# Altium PCB Front_panel.PcbDoc
Units mil, origin at the board's own origin, x right, y up, seen from the top; angles counter-clockwise.
Board outline 4369.68 x 729.91 mil, 2 copper layers (Top Layer, Bottom Layer); 8 components, 23 nets, 63 pads, 0 vias.
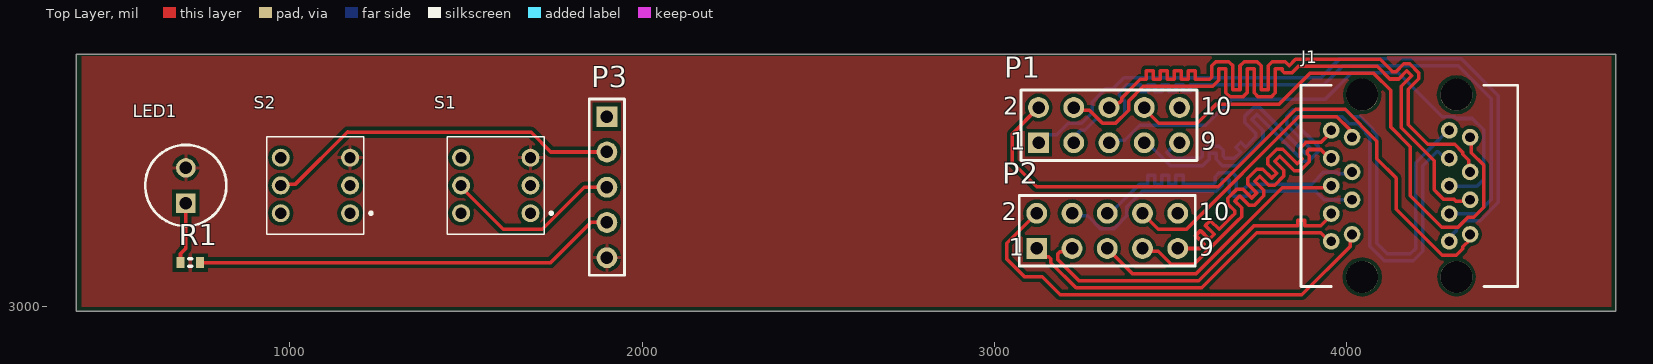
[diagram p0: Top Layer view]
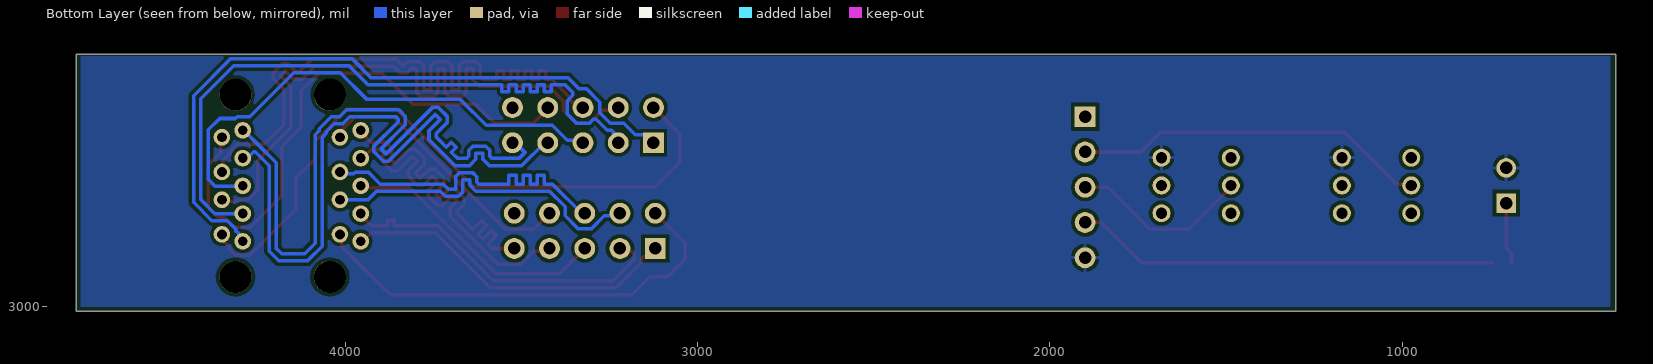
[diagram p1: Bottom Layer view, seen from below]
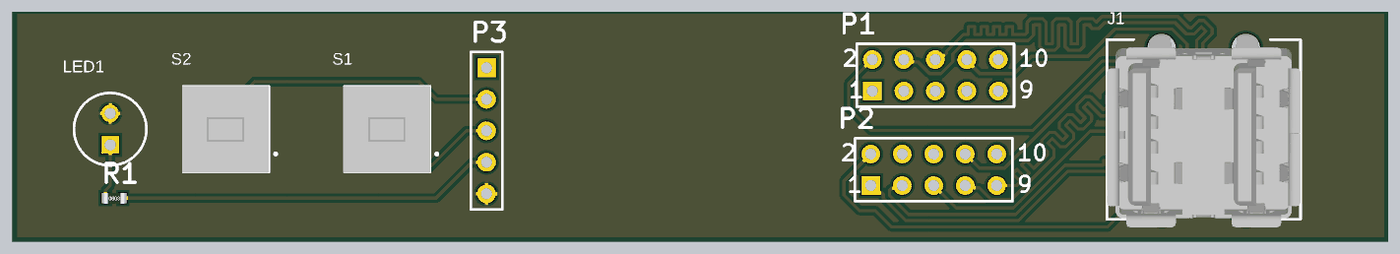
[diagram p2: 3D render of the assembled board from above, using the file's embedded part models]

## Layer stack, top to bottom
Top Solder: solder mask 0.4, Solder Resist, Dk 3.5
Top Layer: signal copper 1.4
Dielectric 1: dielectric 12.6, FR-4, Dk 4.8
Bottom Layer: signal copper 1.4
Bottom Solder: solder mask 0.4, Solder Resist, Dk 3.5

## Board outline
4763.38,3716.56 393.7,3716.56 393.7,2986.64 4763.38,2986.64

## Design rules (kind name [scope] priority, off if disabled: settings)
AssemblyTestPointUsage AssemblyTestPointUsage_1 [All] p2:
AssemblyTestpoint AssemblyTestpoint_1 [All] p2: testpointundercomponent=TRUE minsize=40 maxsize=100 preferedsize=60 minholesize=0 maxholesize=40 preferedholesize=32 testpointgrid=1 usegrid=TRUE gridtolerance=0.01 allowsidetop=TRUE allowsidebottom=TRUE
Clearance [All] p1: gap=10 ignorepadtopadclearanceinfootprint=FALSE except(0: Arc-Hole Track-Hole SMDPad-Hole THPad-Hole Via-Hole Fill-Hole Poly-Hole Region-Hole Text-Hole)
Clearance Clearance_1 [All] p2: gap=10 ignorepadtopadclearanceinfootprint=FALSE except(0: Arc-Hole Track-Hole SMDPad-Hole THPad-Hole Via-Hole Fill-Hole Poly-Hole Region-Hole Text-Hole)
ComponentClearance ComponentClearance_1 [All] p2: gap=10 collisioncheckmode=3 verticalgap=10 showdistances=FALSE
DiffPairsRouting [All] p1: maxlimit=10 minlimit=10 mostfreqgap=10 toplayer_minwidth=10 toplayer_maxwidth=15 toplayer_prefwidth=15 bottomlayer_minwidth=10 bottomlayer_maxwidth=15 bottomlayer_prefwidth=15 maxuncoupledlength=500
DiffPairsRouting DiffPairsRouting_1 [All] p2: maxlimit=10 minlimit=10 mostfreqgap=10 toplayer_minwidth=15 toplayer_maxwidth=15 toplayer_prefwidth=15 bottomlayer_minwidth=15 bottomlayer_maxwidth=15 bottomlayer_prefwidth=15 maxuncoupledlength=500
FabricationTestPointUsage FabricationTestPointUsage_1 [All] p2: valid=0 allowmultiple=FALSE
FabricationTestpoint FabricationTestpoint_1 [All] p2: side=3 testpointundercomponent=TRUE minsize=40 maxsize=100 preferedsize=60 minholesize=0 maxholesize=40 preferedholesize=32 testpointgrid=1 allowsidetop=TRUE allowsidebottom=TRUE usegrid=TRUE gridtolerance=0.01
FanoutControl Fanout_LCC [IsLCC] p1: bgadir=Out bgaviamode=Centered fanoutstyle=Auto fanoutdirection=Alternating viagrid=1 // Fanout_LCC (Default Rule)
FanoutControl Fanout_BGA [IsBGA] p2: bgadir=Out bgaviamode=Centered fanoutstyle=Auto fanoutdirection=Alternating viagrid=1 // Fanout_BGA (Default Rule)
FanoutControl Fanout_Small [(CompPinCount < 5)] p3: bgadir=Out bgaviamode=Centered fanoutstyle=Auto fanoutdirection=OutThenIn viagrid=1 // Fanout_Small (Default Rule)
FanoutControl Fanout_SOIC [IsSOIC] p4: bgadir=Out bgaviamode=Centered fanoutstyle=Auto fanoutdirection=Alternating viagrid=1 // Fanout_SOIC (Default Rule)
FanoutControl Fanout_BGA_1 [IsBGA] p6: bgadir=Out bgaviamode=Centered fanoutstyle=Auto fanoutdirection=Alternating viagrid=1 // Fanout_BGA (Default Rule)
FanoutControl Fanout_LCC_1 [IsLCC] p7: bgadir=Out bgaviamode=Centered fanoutstyle=Auto fanoutdirection=Alternating viagrid=1 // Fanout_LCC (Default Rule)
FanoutControl Fanout_SOIC_1 [IsSOIC] p8: bgadir=Out bgaviamode=Centered fanoutstyle=Auto fanoutdirection=Alternating viagrid=1 // Fanout_SOIC (Default Rule)
FanoutControl Fanout_Small_1 [(CompPinCount < 5)] p9: bgadir=Out bgaviamode=Centered fanoutstyle=Auto fanoutdirection=OutThenIn viagrid=1 // Fanout_Small (Default Rule)
FanoutControl Fanout_Default_1 [All] p10: bgadir=Out bgaviamode=Centered fanoutstyle=Auto fanoutdirection=Alternating viagrid=1 // Fanout_Default (Default Rule)
Height Height_1 [All] p2: minheight=0 maxheight=1000 prefheight=500
HoleSize HoleSize_1 [All] p2: absolutevalues=TRUE maxlimit=100 minlimit=1 maxpercent=80.000 minpercent=20.000
HoleToHoleClearance HoleToHoleClearance_1 [All] p2: gap=10 allowstackedmicrovias=TRUE
LayerPairs LayerPairs_1 [All] p2: enforce=TRUE
MinimumSolderMaskSliver MinimumSolderMaskSliver_1 [All] p2: minsoldermaskwidth=10
NetAntennae NetAntennae_1 [All] p2: netantennaetolerance=0
PasteMaskExpansion PasteMaskExpansion_1 [All] p2: expansion=0
PlaneClearance PlaneClearance_1 [All] p2: clearance=20
PlaneConnect PlaneConnect_1 [All] p2: planeconnectstyle=Relief reliefexpansion=20 reliefentries=4 reliefconductorwidth=10 reliefairgap=10
PolygonConnect [All] p1: connectstyle=Relief reliefconductorwidth=10 reliefentries=4 polygonreliefangle="90 Angle" airgapwidth=10
PolygonConnect PolygonConnect_1 [All] p2: connectstyle=Relief reliefconductorwidth=10 reliefentries=4 polygonreliefangle="90 Angle" airgapwidth=10
RoutingCorners RoutingCorners_1 [All] p2: cornerstyle=45-Degree minsetback=100 maxsetback=100
RoutingLayers RoutingLayers_1 [All] p2: top layer_v5=TRUE bottom layer_v5=TRUE
RoutingPriority RoutingPriority_1 [All] p2: routingpriority=0
RoutingTopology RoutingTopology_1 [All] p2: topology=Shortest
RoutingVias [All] p1: holewidth=28 width=50 viastyle="Through Hole" minholewidth=28 minwidth=50 maxholewidth=28 maxwidth=50
RoutingVias RoutingVias_1 [All] p2: holewidth=28 width=50 viastyle="Through Hole" minholewidth=28 minwidth=50 maxholewidth=28 maxwidth=50
ShortCircuit ShortCircuit_1 [All] p2: allowed=FALSE
SilkToBoardRegionClearance SilkToBoardRegionClearance_1 [All] p2:
SilkToSilkClearance SilkToSilkClearance_1 [All] p2: silktosilkclearance=10
SilkToSolderMaskClearance SilkToSolderMaskClearance_1 [IsPad] p2: minsilkscreentomaskgap=10 clearancetoexposedcopper=TRUE
SolderMaskExpansion [All] p1: expansion=4 istentingtop=FALSE
SolderMaskExpansion SolderMaskExpansion_1 [All] p2: expansion=4 istentingtop=FALSE
UnRoutedNet UnRoutedNet_1 [All] p2:
UnpouredPolygon UnpouredPolygon_1 [All] p2:
Width [All] p1: maxlimit=10 minlimit=10 preferedwidth=10
Width Width_1 [All] p2: maxlimit=10 minlimit=10 preferedwidth=10
25 further rules are at their usual default settings.

## Classes and differential pairs
differential pair STDA_SSTX_2: +STDA_SSTX_2_P -STDA_SSTX_2_N
differential pair STDA_SSTX_1: +STDA_SSTX_1_P -STDA_SSTX_1_N
differential pair STDA_SSRX_2: +STDA_SSRX_2_P -STDA_SSRX_2_N
differential pair STDA_SSRX_1: +STDA_SSRX_1_P -STDA_SSRX_1_N
differential pair D_2: +D_2_P -D_2_N
differential pair D_1: +D_1_P -D_1_N

## Components (designator, comment, footprint, x,y, rotation, side; value= is the part's Value field where it differs from the comment)
J1 "Connector 2xUSB3.0" 48409-0003 4349.67,3205 r90 top locked
LED1 "LTL-307EE" LTL307YE 705,3293.87 r90 top locked
P1 "Header 5X2" HDR2X5 3125,3465 r0 top locked
P2 "Header 5X2" HDR2X5 3120,3165 r0 top locked
P3 "Header 5" HDR1X5 1900,3538.87 r270 top locked
R1 "1k" res-smd-0603 689.88,3125 r0 top locked
S1 "TL2230OAF140" TL2230OAF140 1683.07,3265.13 r90 top locked
S2 "TL2230OAF140" TL2230OAF140 1171.26,3265.13 r90 top locked

## Footprints (in the part's own frame and the unit in brackets; to place one, negate y for a bottom-side part, rotate by r counter-clockwise, add the part's x,y. Pads: shape width x height; smd on the part's side, far side on the other; paste and mask are expansions set on the pad)
48409-0003 [mm]
  round 1.2 hole 0.7: 1(0,0) 2(2.5,0) 3(4.5,0) 4(7,0) 5(7.5,1.5) 6(5.5,1.5) 7(3.5,1.5) 8(1.5,1.5) 9(-0.5,1.5) 10(0,8.51) 11(2.5,8.51) 12(4.5,8.51) 13(7,8.51) 14(7.5,10.01) 15(5.5,10.01) 16(3.5,10.01) 17(1.5,10.01) 18(-0.5,10.01)
  round 2.3 hole 2.3 unplated: 19(-3.07,0.98) 20(10.07,0.98) 21(-3.07,7.78) 22(10.07,7.78)
  silkscreen extent -3.75,-3.43 10.75,12.19, body extent -4.38,-3.43 11.37,12.19, height 15.31
HDR1X5 [mm] "Connector; Header; 5 Position"
  rect 1.5x1.5 hole 0.9: 1(0,0)
  round 1.5 hole 0.9: 2(2.54,0) 3(5.08,0) 4(7.62,0) 5(10.16,0)
  silkscreen extent -1.27,-1.27 11.43,1.27
HDR2X5 [mm] "Connector; Header; 5x2 Position"
  rect 1.5x1.5 hole 0.9: 1(0,0)
  round 1.5 hole 0.9: 2(0,2.54) 3(2.54,0) 4(2.54,2.54) 5(5.08,0) 6(5.08,2.54) 7(7.62,0) 8(7.62,2.54) 9(10.16,0) 10(10.16,2.54)
  silkscreen extent -1.27,-1.27 11.43,3.81
LTL307YE [mm]
  rect 1.416x1.416 hole 0.91: 1(0,0)
  round 1.416 hole 0.91: 2(2.54,0)
  silkscreen extent -1.66,-2.92 4.2,2.92, body extent -0.75,-1.55 3.24,1.94, height 5.88
res-smd-0603 [mm]
  rect 0.6x0.8 smd: 1(0,0) 2(1.4,0)
  silkscreen extent 0.61,-0.28 0.81,0.28, body extent -0.11,-0.45 1.53,0.4, height 0.26
TL2230OAF140 [mm]
  round 1.3 hole 0.8: 1(0,0) 2(2,0) 3(4,0) 4(0,5) 5(2,5) 6(4,5)
  silkscreen extent -1.5,-1.6 5.5,6, body extent -1.52,-0.96 5.48,6.04, height 3

## Part data
J1: library part 48409-0003, "Conector 2xUSB3.0 Molex", Manufacturer_Part_Number=484090003, Mfr_Name="Molex Connector Corporation", Copyright="Copyright (C) 2021 Ultra Librarian. All rights reserved.", RefDes=RefDes, Type=DEV
LED1: "LED Red", Manufacturer_Name=Lite-On, Datasheet Link=http://media.digikey.com/pdf/Data%20Sheets/Lite-On%20PDFs/LTL-307EE.pdf, Height=9.85mm, Manufacturer_Part_Number=LTL-307EE
P1 P2: "Header, 5-Pin, Dual row", LatestRevisionDate=17-Jul-2002, LatestRevisionNote="Re-released for DXP Platform.", Publisher="Altium Limited"
P3: "Header, 5-Pin", LatestRevisionDate=17-Jul-2002, LatestRevisionNote="Re-released for DXP Platform.", Publisher="Altium Limited"
R1: library part Res1, "Resistor", LatestRevisionDate=17-Jul-2002, LatestRevisionNote="Re-released for DXP Platform.", PackageDescription="Axial Device, Thru-Hole; 2 Leads; 0.3 in Pin Spacing", PackageReference=AXIAL-0.3, Published=8-Jun-2000, Publisher="Altium Limited"
S1 S2: "Switch Momentary", Manufacturer_Name=E-Switch, Mouser2 Part Number=612-TL2230-OA, Datasheet Link=https://componentsearchengine.com//TL2230OAF140.pdf, Height=12.5mm, Manufacturer_Part_Number=TL2230OAF140, Mouser2 Price/Stock=https://www.mouser.com/Search/Refine.aspx?Keyword=612-TL2230-OA

## Nets (pads, with @x,y where several pads share a name; then routed paths per layer and width w, separated by ;. In a path a pad name is that pad's centre, name@x,y a point inside that pad or via, vN(x,y) a via of type N, cw(c..) or ccw(c..) an arc to the next point about the centre after c; other vN are vias at no path point)
D_1_N: J1.11 P2.4 | length 952.8
  Bottom Layer w10: P2.4 3227.5,3257.5 3264.53,3257.5 3301.56,3220.47 3338.44,3220.47 3375.47,3257.5 3375.47,3283.44 3419.82,3327.8 3610,3327.8 3629.14,3327.8 3646.72,3345.37 3646.72,3360.47 3666.72,3360.47 3666.72,3324.51 3678.43,3312.8 3715,3312.8 3730,3327.8 3775,3327.8 3910.95,3327.8 3936.07,3302.68 4013.88,3302.68 J1.11
D_1_P: J1.12 P2.6 | length 964
  Bottom Layer w10: P2.6 3328.74,3265 3411.54,3347.8 3430,3347.8 3435,3347.8 3435,3372.8 3455,3372.8 3455,3347.8 3475,3347.8 3475,3372.8 3495,3372.8 3495,3347.8 3515,3347.8 3515,3372.8 3535,3372.8 3535,3347.8 3545,3347.8 3610,3347.8 3620.86,3347.8 3626.72,3353.65 3626.72,3368.76 3638.43,3380.47 3675,3380.47 3686.72,3368.76 3686.72,3332.8 3706.72,3332.8 3721.72,3347.8 3775,3347.8 3899.94,3347.8 3933.56,3381.42 3971.57,3381.42 3975.82,3377.17 J1.12@4014.63,3377.17
D_2_N: J1.2 P1.4 | length 1904.1
  Top Layer w10: P1.4 3232.5,3557.5 3269.53,3557.5 3306.56,3520.47 3343.44,3520.47 3380.47,3557.5 3380.47,3583.44 3422.03,3625 3619.14,3625 3636.72,3642.57 3636.72,3675 3656.72,3675 3656.72,3606.72 3668.43,3595 3705,3595 3716.72,3606.72 3716.72,3675 3736.72,3675 3736.72,3606.72 3748.43,3595 3785,3595 3796.72,3606.72 3796.72,3675 3816.72,3675 3816.72,3669.84 3823.39,3663.16 3843.96,3663.16 3862.53,3681.73 4086.41,3681.73 4095.82,3672.33 4116.29,3651.86 4122.15,3646 4147,3646 4169.93,3668.93 4184.07,3654.79 4154.46,3625.17 4154.46,3507.78 4247.92,3414.32 4247.92,3331.08 4251.99,3327.01 4251.99,3326.8 4274.62,3304.17 4305.12,3304.17 4310.86,3298.43 J1.2@4349.67,3298.43
D_2_P: J1.3 P1.6 | length 1906.2
  Top Layer w10: P1.6 3338.27,3565 3351.63,3578.36 3354.61,3578.36 3360.47,3584.21 3360.47,3591.73 3413.74,3645 3430,3645 3430,3670 3450,3670 3450,3645 3470,3645 3470,3670 3490,3670 3490,3645 3510,3645 3510,3670 3530,3670 3530,3645 3550,3645 3550,3670 3570,3670 3570,3645 3610.86,3645 3616.72,3650.86 3616.72,3683.28 3628.43,3695 3665,3695 3676.72,3683.28 3676.72,3615 3696.72,3615 3696.72,3683.28 3708.43,3695 3745,3695 3756.72,3683.28 3756.72,3615 3776.72,3615 3776.72,3683.28 3788.43,3695 3825,3695 3836.26,3683.74 3854.25,3701.73 4094.7,3701.73 4122.75,3673.68 4130.43,3666 4138.72,3666 4161.64,3688.93 4178.21,3688.93 4204.07,3663.07 4204.07,3646.5 4174.46,3616.89 4174.46,3516.06 4229.52,3461 4305.77,3461 4329.24,3437.53 4329.24,3432.53 4345.98,3415.79 J1.3@4345.98,3380.85
GND: LED1.2 P3.5 S1.3 S2.3
GND_DRAIN_1: J1.16 P2.5 | length 766.5
  Top Layer w10: P2.5 3391.6,3093.4 3571.83,3093.4 3816.23,3337.8 J1.16@3955.57,3337.8
GND_DRAIN_2: J1.7 P1.5 | length 1459.4
  Bottom Layer w10: P1.5 3332.5,3472.5 3369.53,3472.5 3412.03,3515 3600,3515 3673,3588 3938,3588 4014,3664 4146,3664 4271.1,3538.9 4306.61,3538.9 4311.61,3533.9 4356.1,3533.9 4388.29,3501.71 4388.29,3385.02 4388.29,3361.17 4369.17,3342.05 4333.67,3342.05 4333.62,3342 4291.41,3342 J1.7
GND_USB_1: J1.13 P2.8 | length 783.4
  Top Layer w10: P2.8 3465,3220 3545,3220 3863.9,3538.9 3971.57,3538.9 4007.5,3502.97 4007.5,3482.72 J1.13@4014.63,3475.59
GND_USB_2: J1.4 P1.8 | length 1598.2
  Top Layer w10: P1.8 3425,3561.33 3465.86,3520.47 3575.47,3520.47 3630,3575 3808.3,3575 3895.03,3661.73 4076.27,3661.73 4124.17,3613.83 4124.17,3509.78 4180,3453.95 4180,3315.05 4269.62,3225.43 4315.43,3225.43 4343.71,3253.71 4359.58,3253.71 4388.29,3282.43 4388.29,3401.76 4353.08,3436.97 4353.08,3472.17 J1.4@4349.67,3475.59
LED: P3.4 R1.2 | length 1202.2
  Top Layer w10: R1.2 1740,3125 1853.87,3238.87 P3.4
NetLED1_1: LED1.1 R1.1 | length 170.1
  Top Layer w10: R1.1 689.89,3149.89 705,3165 LED1.1@705,3288.87
STDA_SSRX_1_N: J1.14 P2.9 | length 988.5
  Top Layer w10: P2.9 3582.97,3165 3591.49,3173.51 3595.02,3177.05 3570.27,3201.8 3584.41,3215.94 3609.16,3191.19 3623.31,3205.33 3598.56,3230.08 3612.7,3244.23 3637.45,3219.48 3647.67,3229.7 3673.99,3256.01 3681.66,3263.69 3681.66,3271.98 3662.27,3291.37 3662.27,3307.94 3688.13,3333.8 3704.7,3333.8 3730.18,3308.31 3744.32,3322.46 3718.84,3347.94 3718.84,3364.51 3744.7,3390.36 3761.26,3390.36 3786.75,3364.88 3800.89,3379.03 3775.41,3404.51 3775.41,3421.08 3801.26,3446.93 3817.83,3446.93 3859.05,3405.72 3873.19,3419.86 3867.94,3425.11 3867.94,3449.97 3881.49,3463.51 3883.88,3465.91 3926.2,3465.91 J1.14@3955.57,3495.28
STDA_SSRX_1_P: J1.15 P2.7 | length 977.5
  Top Layer w10: P2.7 3427.5,3157.5 3464.53,3157.5 3502.03,3120 3566.26,3120 3688.13,3241.87 3701.66,3255.41 3701.66,3280.26 3682.27,3299.65 3696.41,3313.8 3721.89,3288.31 3738.46,3288.31 3764.32,3314.17 3764.32,3330.74 3738.84,3356.22 3752.98,3370.36 3778.46,3344.88 3795.03,3344.88 3820.89,3370.74 3820.89,3387.31 3795.41,3412.79 3809.55,3426.93 3850.76,3385.72 3867.33,3385.72 3893.19,3411.58 3893.19,3428.15 3887.94,3433.4 3887.94,3441.68 3892.16,3445.91 3899.09,3445.91 3926.2,3445.91 J1.15@3955.57,3416.54
STDA_SSRX_2_N: J1.5 P1.9 | length 2025.2
  Bottom Layer w10: P1.9 3517.04,3465 3489.53,3437.49 3506.56,3420.47 3583.06,3420.47 3588.92,3426.33 3588.92,3443.76 3600.64,3455.47 3637.21,3455.47 3648.92,3443.76 3648.92,3426.33 3654.78,3420.47 3680.34,3420.47 3698.47,3438.6 3684.33,3452.74 3698.47,3466.89 3712.61,3452.74 3729.93,3470.07 3742,3482.14 3742,3490.43 3709.6,3522.83 3709.6,3539.4 3735.45,3565.26 3752.02,3565.26 3884.03,3433.25 3898.17,3447.39 3829.69,3515.87 3829.69,3540.72 3847.27,3558.3 ; J1.5@4290.61,3495.28 4282.33,3495.28 4247.1,3460.05 4195,3407.95 4195,3165 4180,3150 4115,3150 4085,3180 4085,3488.12 4073.25,3499.87 4073.25,3504.87 4038.91,3539.21 4015.37,3539.21 3995.69,3558.9 3892.12,3558.9 ; 3847.27,3558.3 3847.87,3558.9 ; 3847.27,3558.3 3847.87,3558.9 ; 3847.87,3558.9 3892.12,3558.9 ; 3847.87,3558.9 3892.12,3558.9
STDA_SSRX_2_P: J1.6 P1.7 | length 1972.4
  Bottom Layer w10: P1.7 3433.74,3465 3498.27,3400.47 3591.35,3400.47 3608.92,3418.05 3608.92,3435.47 3628.92,3435.47 3628.92,3418.05 3646.5,3400.47 3688.62,3400.47 3744.08,3455.92 3762,3473.86 3762,3498.71 3729.6,3531.11 3743.74,3545.26 3875.74,3413.25 3892.31,3413.25 3918.17,3439.11 3918.17,3455.68 3849.69,3524.15 3849.69,3532.44 3855.55,3538.3 3918.15,3538.9 3939.58,3538.9 3987.4,3538.9 4007.09,3519.21 4030.63,3519.21 4053.25,3496.59 4053.25,3491.59 4065,3479.84 4065,3171.72 4106.72,3130 4188.28,3130 4215,3156.72 4215,3399.66 4255.39,3440.05 4259.51,3440.05 4283.02,3416.54 J1.6@4290.61,3416.54
STDA_SSTX_1_N: J1.17 P2.3 | length 970.5
  Top Layer w10: P2.3 3211.17,3156.17 3185.86,3156.17 3180,3150.31 3180,3133.02 3239.61,3073.4 3580.12,3073.4 3736.4,3229.68 3850,3229.68 3860,3229.68 3860,3244.68 3880,3244.68 3880,3229.68 3905,3229.68 3926.2,3229.68 J1.17@3955.57,3259.06
STDA_SSTX_1_P: J1.18 P2.1 | length 965.3
  Top Layer w10: P2.1 3143.2,3141.8 3154.14,3141.8 3160,3135.94 3160,3124.73 3231.33,3053.4 3588.4,3053.4 3744.68,3209.68 3926.2,3209.68 J1.18@3955.57,3180.32
STDA_SSTX_2_N: J1.8 P1.3 | length 1973.6
  Bottom Layer w10: P1.3 3225,3478.27 3238.36,3491.63 3238.36,3494.61 3244.21,3500.47 3256.1,3500.47 3287.19,3531.56 3295.47,3531.56 3306.56,3520.47 3343.44,3520.47 3369.53,3546.56 3369.53,3583.44 3353.56,3599.41 3353.56,3607.7 3375.86,3630 3415,3630 3415,3610 3435,3610 3435,3630 3455,3630 3455,3610 3475,3610 3475,3630 3495,3630 3495,3610 3515,3610 3515,3630 3535,3630 3535,3610 3555,3610 3555,3630 3934.94,3630 3988.94,3684 4316,3684 4410,3590 4410,3304.14 4369.92,3264.05 J1.8
STDA_SSTX_2_P: J1.9 P1.1 | length 1967.1
  Bottom Layer w10: P1.1 3148.2,3488.2 3176.59,3488.2 3208.87,3520.47 3247.82,3520.47 3277.19,3549.84 3277.19,3580.16 3314.73,3617.7 3335.27,3617.7 3367.57,3650 3565,3650 3926.66,3650 3980.66,3704 4324.28,3704 4430,3598.28 4430,3295.85 4378.14,3243.99 4334.04,3243.99 4311.05,3221 4311.05,3216 4302.8,3207.75 4302.8,3207.58 4290.61,3195.39 J1.9@4290.61,3180.32
SW1: P3.3 S1.5 | length 512.6
  Top Layer w10: S1.5@1486.22,3338.87 1605.55,3219.54 1716.83,3219.54 1836.16,3338.87 P3.3
SW2: P3.2 S2.5 | length 1014.2
  Top Layer w10: S2.5@974.41,3338.87 982.26,3346.72 1015,3346.72 1164.14,3495.86 1165,3495 1685,3495 1741.13,3438.87 P3.2
VBUS_1: J1.10 P2.2 | length 1270
  Top Layer w10: P2.2 3035,3180 3035,3135 3085,3085 3135,3085 3186.6,3033.4 3872.08,3033.4 4009.34,3170.67 4009.34,3194.71 J1.10@4014.63,3200
VBUS_2: J1.1 P1.2 | length 1889.9
  Top Layer w10: P1.2 3050,3490 3050,3410 3120,3340 3635,3340 3855,3560 3995,3560 4085.31,3469.69 4085.31,3419.69 4140,3365 4140,3276.31 4270.31,3146 4310.92,3146 4329.24,3164.32 4329.24,3169.49 4349.67,3189.92 J1.1@4349.67,3200
pads on no net: J1.19 J1.20 J1.21 J1.22 P1.10 P2.10 P3.1 S1.1 S1.2 S1.4 S1.6 S2.1 S2.2 S2.4 S2.6

## Polygon pours and split planes (outlines as drawn)
GND on Top Layer "GND_L01_P000" (solid, pour order 0): 410,3710 4750,3710 4750,3000 410,3000
GND on Bottom Layer "GND_L02_P001" (solid, pour order 1): 410,3710 4750,3710 4750,3000 410,3000

## Text inside footprints (layer, text, board x,y; h text height)
P1: Top Overlay "2" at 3025,3545 h50; Top Overlay "1" at 3045,3445 h50; Top Overlay "9" at 3585,3445 h50; Top Overlay "10" at 3585,3545 h50
P2: Top Overlay "2" at 3020,3245 h50; Top Overlay "1" at 3040,3145 h50; Top Overlay "9" at 3580,3145 h50; Top Overlay "10" at 3580,3245 h50